# Altium PCB 智能车主板.PcbDoc
Units mil, origin at the board's own origin, x right, y up, seen from the top; angles counter-clockwise.
Board outline 3937.01 x 2560 mil, 4 copper layers (Top, GND02, PWR03, BOTTON), stack 23.756 mil thick; 92 components, 74 nets, 361 pads, 142 vias.
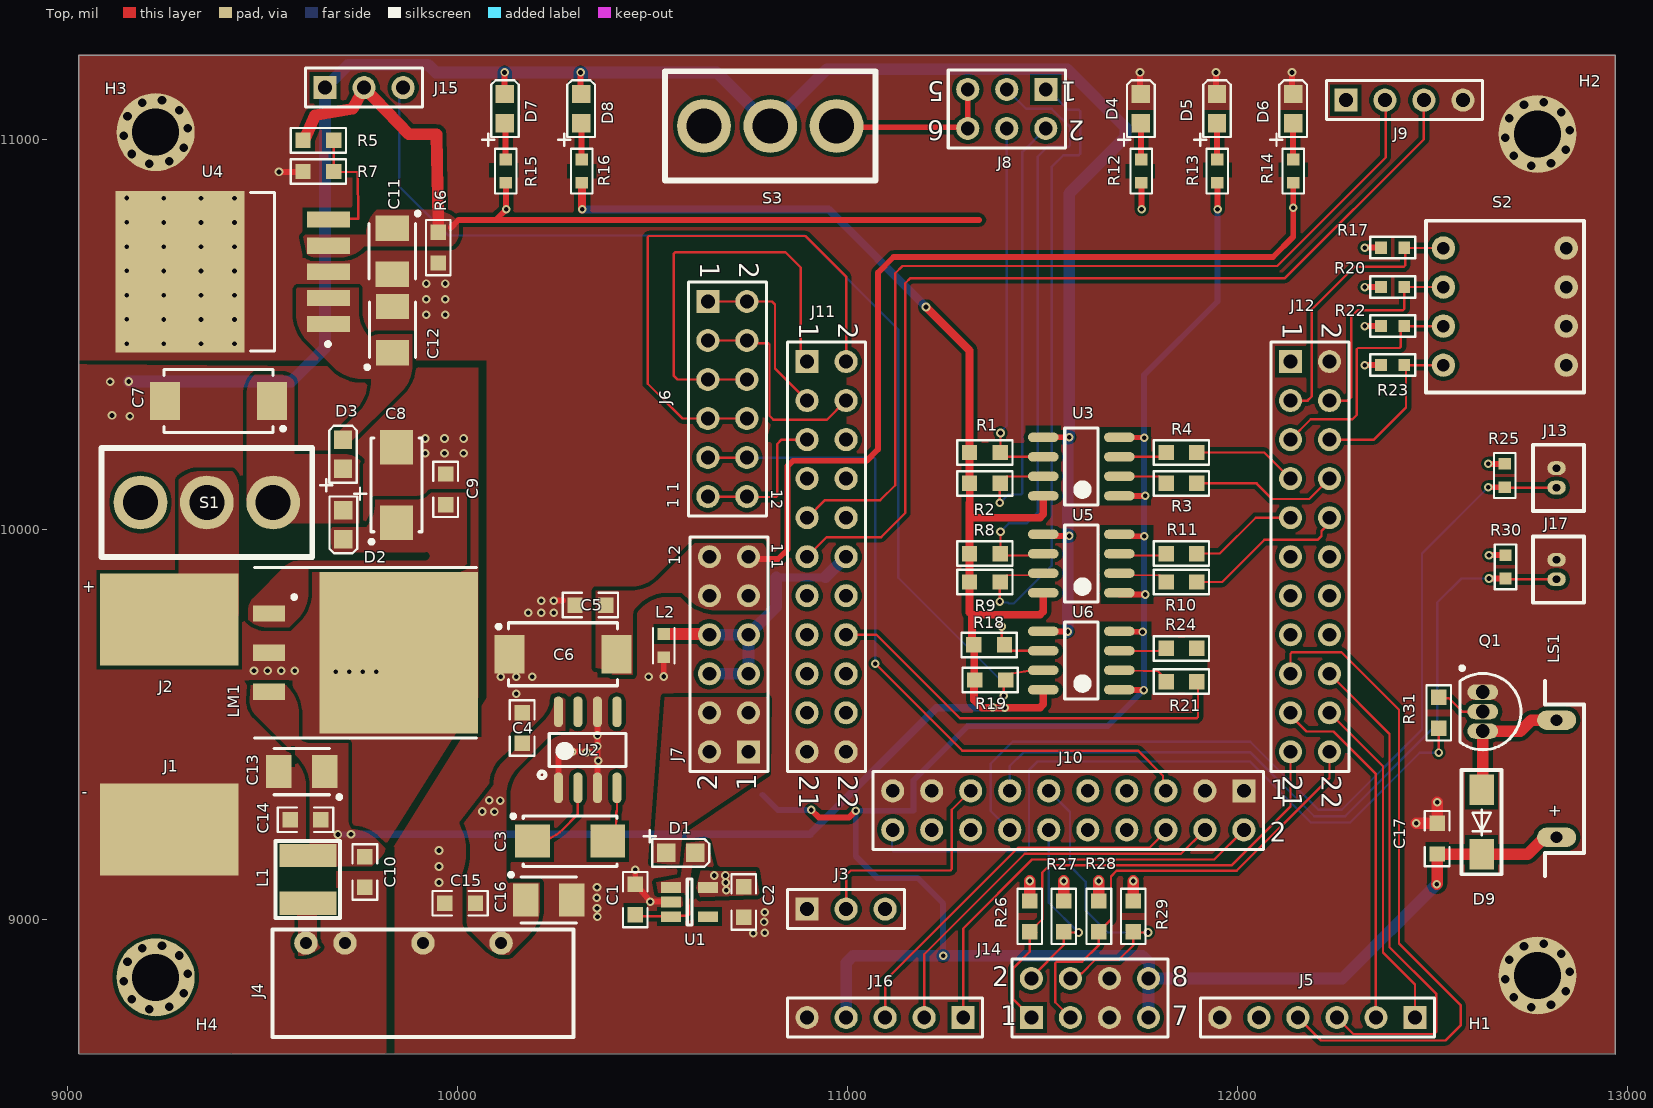
[diagram p0: Top view]
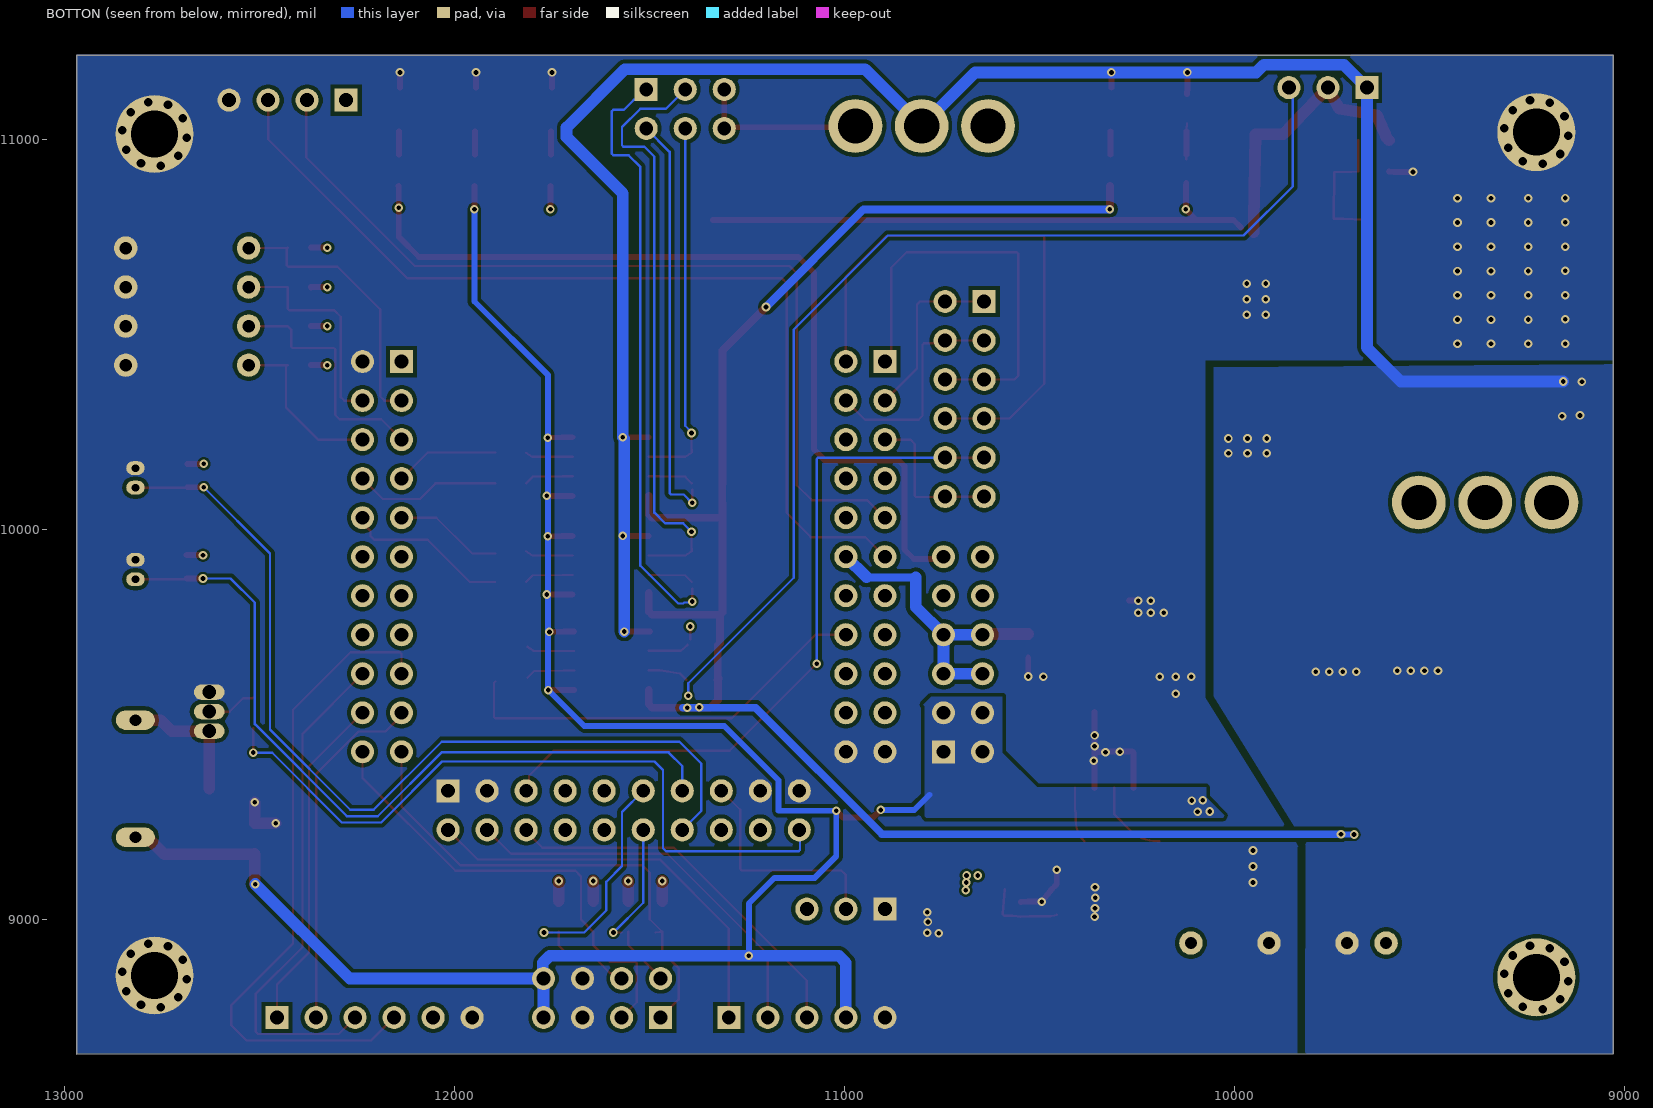
[diagram p1: BOTTON view, seen from below]
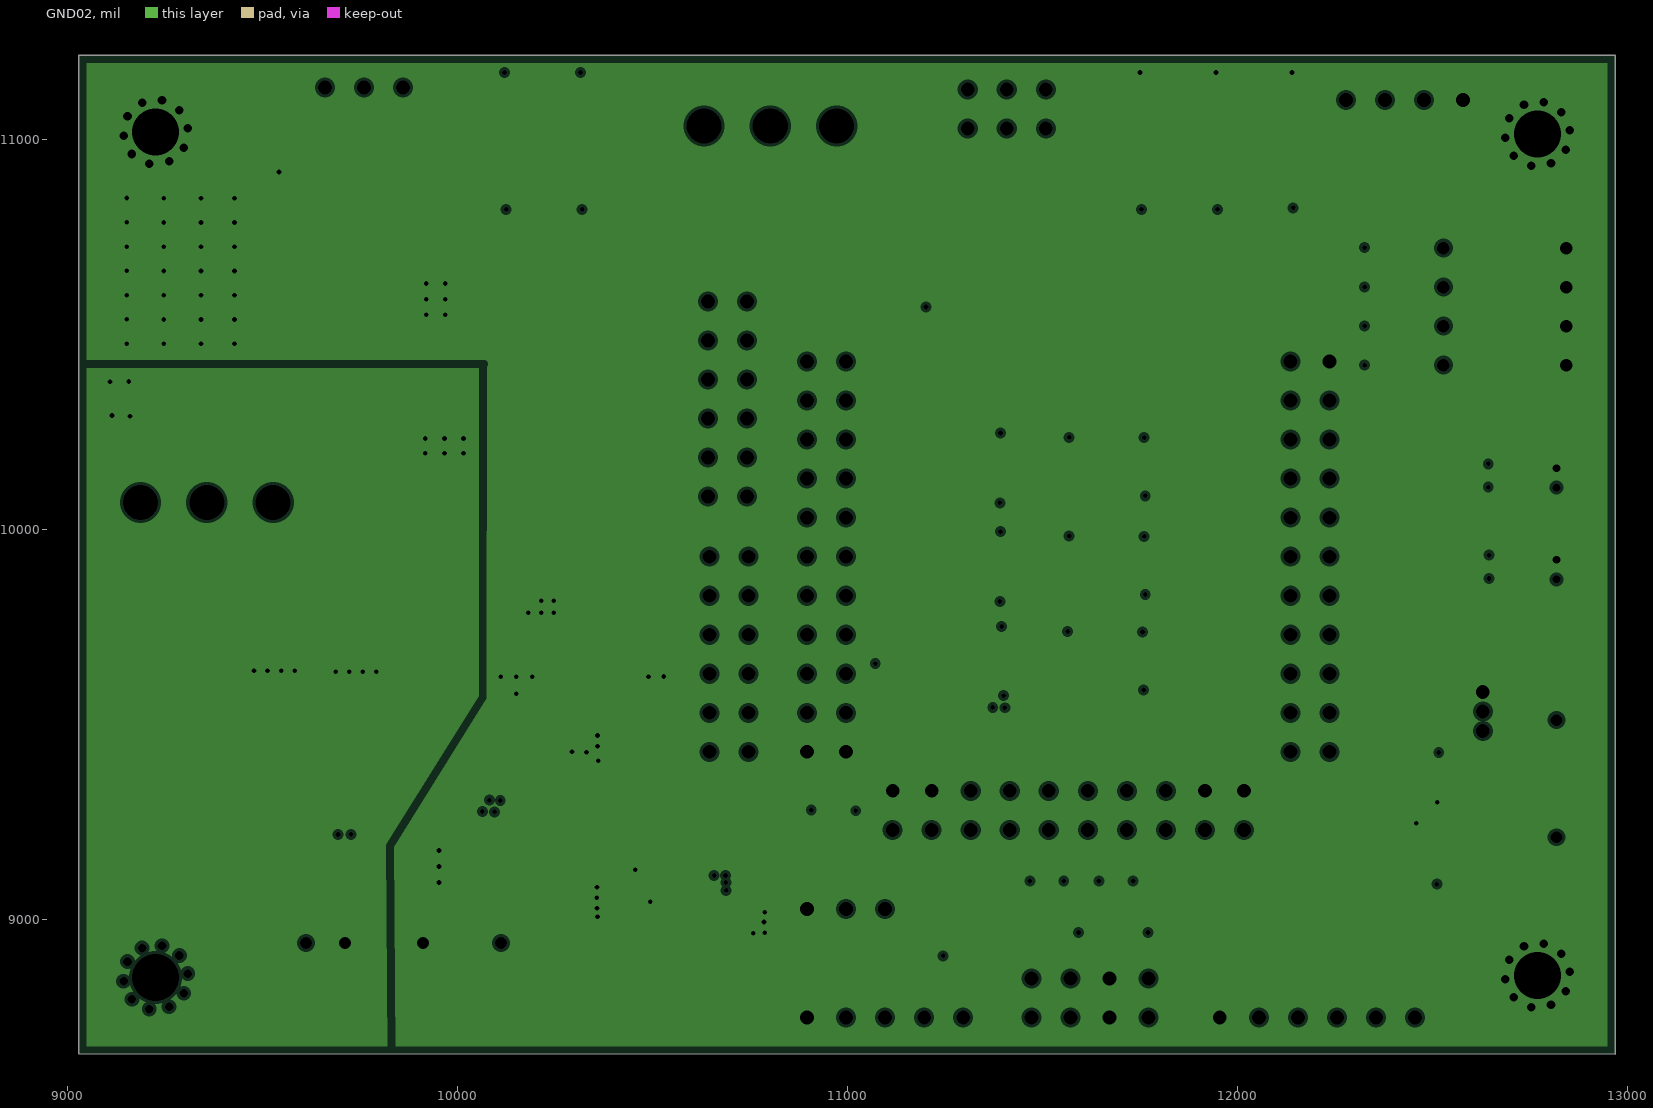
[diagram p2: GND02, clearances drawn from the general rule]
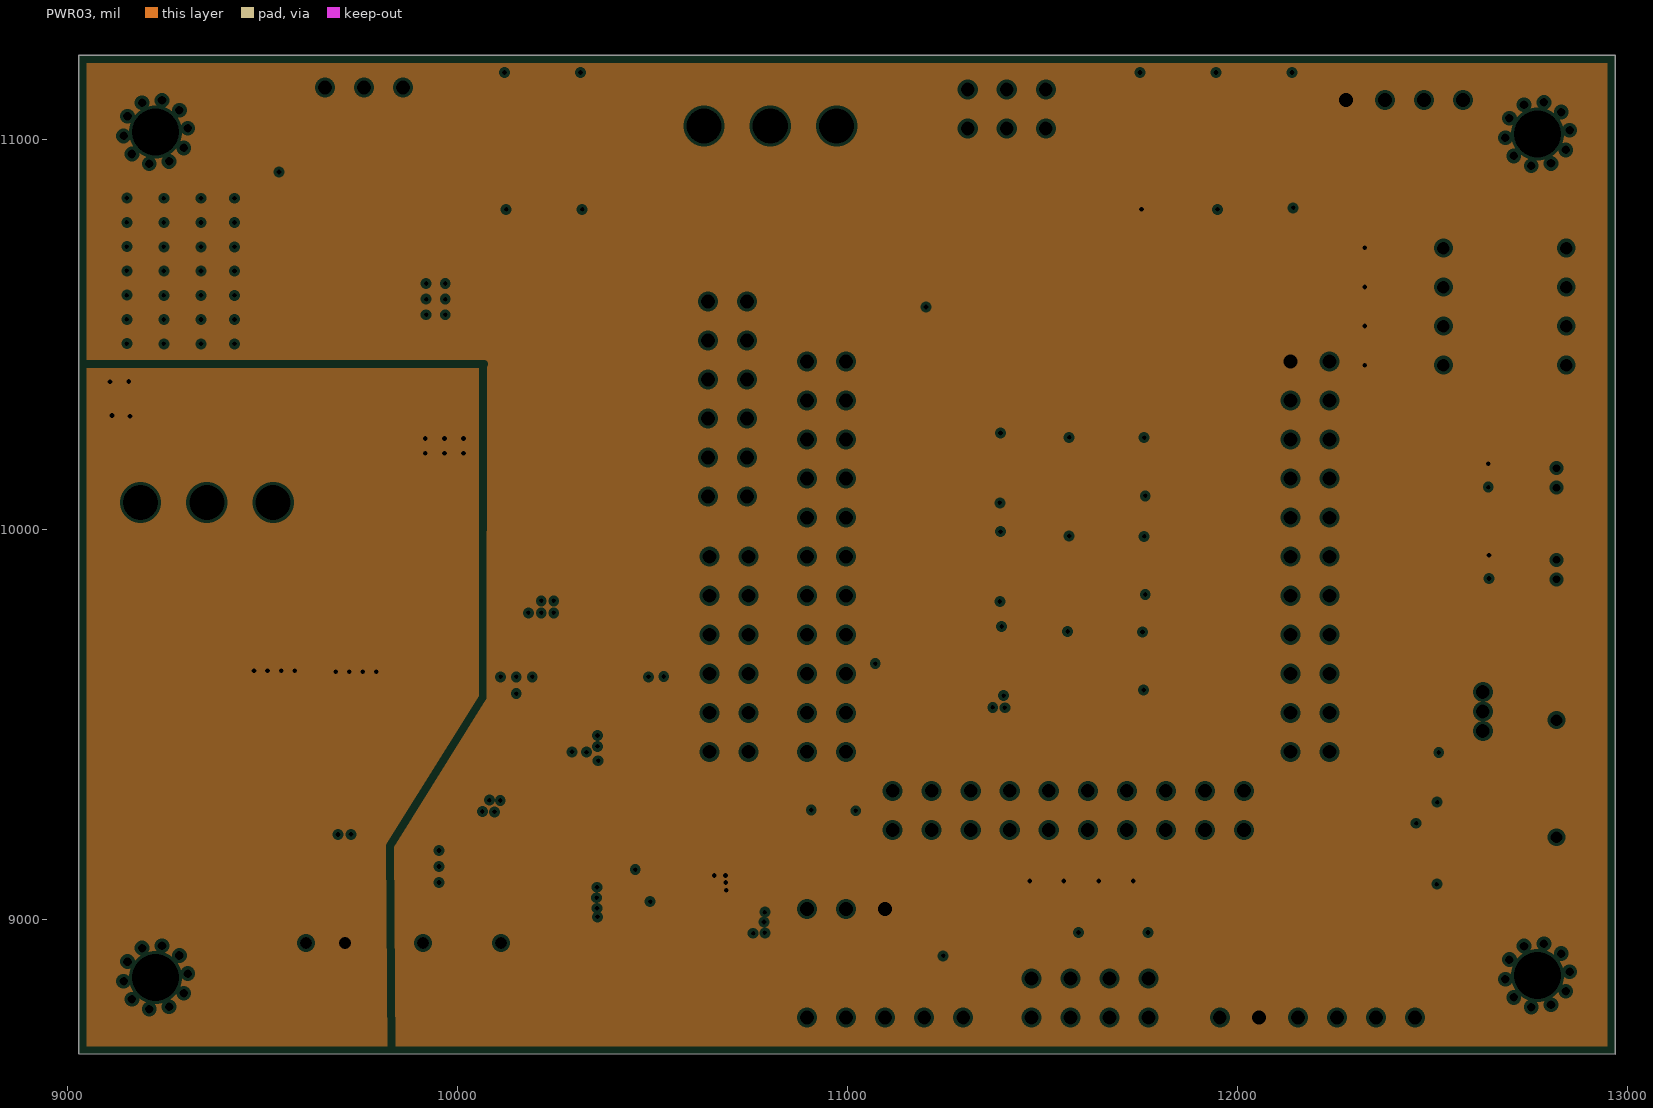
[diagram p3: PWR03, clearances drawn from the general rule]

## Layer stack, top to bottom
Top Solder: solder mask 0.4, Solder Resist, Dk 3.5
Top: signal copper 1.4
Dielectric 2: prepreg 2.8, PP-006, Dk 4.1
GND02: plane copper 1.378, net GND
Dielectric 1: dielectric 12.6, FR-4, Dk 4.8
PWR03: plane copper 1.378, net VCC3.3
Dielectric 3: prepreg 2.8, PP-006, Dk 4.1
BOTTON: signal copper 1.4
Bottom Solder: solder mask 0.4, Solder Resist, Dk 3.5

## Board outline
9030,8655.94 9030,11215 12967.01,11215 12967.01,8655

## Design rules (kind name [scope] priority, off if disabled: settings)
Clearance [All] p1: gap=6 ignorepadtopadclearanceinfootprint=FALSE except(8: Arc-Arc Arc-Track Track-Track; 10: Arc-Fill Arc-Poly Arc-Region Track-Fill Track-Poly Track-Region SMDPad-Fill SMDPad-Poly SMDPad-Region THPad-Fill THPad-Poly THPad-Region Fill-Fill Fill-Poly Fill-Region Poly-Poly Poly-Region Region-Region)
PlaneClearance [All] p1: clearance=8
PlaneConnect [All] p1: planeconnectstyle=Direct reliefexpansion=20 reliefentries=4 reliefconductorwidth=10 reliefairgap=10
PolygonConnect [All] p1: connectstyle=Direct reliefconductorwidth=10 reliefentries=4 polygonreliefangle="90 Angle" airgapwidth=10
RoutingVias [All] p1: holewidth=12 width=22 viastyle="Through Hole" minholewidth=12 minwidth=22 maxholewidth=12 maxwidth=22
SilkToSilkClearance [All] p1: silktosilkclearance=2
SilkToSolderMaskClearance [IsPad] p1: minsilkscreentomaskgap=2 clearancetoexposedcopper=TRUE
SolderMaskExpansion [All] p1: expansion=4 istentingtop=FALSE
SupplyNets "Schematic Supply Nets_10" [InNet('VBAT+')] p1: voltage=0.000
SupplyNets "Schematic Supply Nets_9" [InNet('GND')] p2: voltage=0.000
SupplyNets "Schematic Supply Nets_8" [InNet('AGND')] p3: voltage=0.000
SupplyNets "Schematic Supply Nets_7" [InNet('GGND')] p4: voltage=0.000
SupplyNets "Schematic Supply Nets_6" [InNet('VCC-5')] p5: voltage=0.000
SupplyNets "Schematic Supply Nets_5" [InNet('V5')] p6: voltage=0.000
SupplyNets "Schematic Supply Nets_4" [InNet('VCC5')] p7: voltage=0.000
SupplyNets "Schematic Supply Nets_3" [InNet('V6')] p8: voltage=0.000
SupplyNets "Schematic Supply Nets_2" [InNet('VCC3.3')] p9: voltage=0.000
SupplyNets "Schematic Supply Nets_1" [InNet('VCC')] p10: voltage=0.000
SupplyNets "Schematic Supply Nets" [InNet('VBAT')] p11: voltage=0.000
Width PWR [InNetClass('PWR')] p1: maxlimit=60 minlimit=15 preferedwidth=15
Width Width_1 [All] p2: maxlimit=6 minlimit=6 preferedwidth=6
26 further rules are at their usual default settings.

## Classes and differential pairs
net class PWR: AGND GGND GND NetD9_1 V5 V6 VBAT VBAT+ VCC VCC3.3 VCC5 VCC-5

## Components (designator, comment, footprint, x,y, rotation, side; value= is the part's Value field where it differs from the comment)
C1 "4.7uF" 0805C 10456,9051.37 r270 top locked
C2 "4.7uF" 0805C 10734,9045 r90 top locked
C3 "47uF" C型钽电容_6032_28 10289,9201 r0 top locked
C4 "10uF" 0805C 10166,9491 r90 top locked
C5 "0.1uF" 0805C 10341,9806 r0 top locked
C6 "100uF" D型钽电容_7343_31 10271,9680 r0 top locked
C7 "47uF" D型钽电容_7343_31 9388,10329 r180 top locked
C8 "22uF" C型钽电容_6032_28 9844,10114 r90 top locked
C9 "0.1uF" 0805C 9970,10102.63 r90 top locked
C10 "4.7uF" 0805C 9763,9122 r90 top locked
C11 "22uF" B型钽电容_3528_21 9833.17,10713 r270 top locked
C12 "22uF" B型钽电容_3528_21 9834,10512 r90 top locked
C13 "22uF" B型钽电容_3528_21 9601,9379 r180 top locked
C14 "0.1uF" 0805C 9611,9256 r180 top locked
C15 "0.1uF" 0805C 10007,9042 r0 top locked
C16 "22uF" B型钽电容_3528_21 10234,9050 r0 top locked
C17 "104" 0805C 12511,9207.63 r270 top locked
D1 "1N5819" 0805D 10572.6,9171 r0 top locked
D2 "SS34" 0805D 9707.77,10011.6 r270 top locked
D3 "1N5819" 0805D 9707,10192.6 r90 top locked
D4 "LED_2" 0805D 11751.5,11078.4 r90 top locked
D5 "LED_2" 0805D 11946.75,11078.4 r90 top locked
D6 "LED_2" 0805D 12142,11078.4 r90 top locked (schematic designator D5)
D7 "LED_2" 0805D 10122,11078.4 r90 top locked
D8 "LED_2" 0805D 10317.25,11078.4 r90 top locked
D9 "SS34" SS34_3D 12625,9250 r270 top locked
H1 "固定孔" 铜柱孔3 12768.15,8856.85 r0 top locked
H2 "固定孔" 铜柱孔3 12768.15,11013.15 r0 top locked
H3 "固定孔" 铜柱孔3 9226.85,11018.15 r0 top locked
H4 "固定孔" 铜柱孔3 9226.85,8851.85 r0 top locked
J1 "-" 单面焊盘2*3MM_1PIN 9261.67,9231.11 r90 top locked
J2 "-" 单面焊盘2*3MM_1PIN 9261.67,9769 r90 top locked
J3 "AD-KEY" HDR1X3 10896.32,9026.88 r0 top locked
J4 "bluetooth" B0505S-2W 9862,8940 r0 top locked
J5 "OLED" HDR1X6 12454,8749 r180 top locked
J6 "CON12" HDR2X6 10642,10584 r270 top locked
J7 "CON12" HDR2X6 10746,9430 r90 top locked
J8 "motor drive" HDR2X3 11508,11127.44 r180 top locked
J9 "bluetooth" HDR1X4 12277,11100 r0 top locked
J10 "HEADER 10X2" HDR2X10 12015.63,9330 r180 top
J11 "HEADER 11X2" HDR2X11 10896.32,10430 r270 top
J12 "HEADER 11X2" HDR2X11 12135,10430 r270 top
J13 "CON2" 2PIN杜邦插座_1.27mm 12816.96,10107 r90 top locked
J14 "BM" HDR2X4 11471,8749 r0 top locked
J15 "servo drive" HDR1X3 9661,11132 r0 top locked
J16 "CCD" HDR1X5 11296.32,8749 r180 top locked
J17 "CON2" 2PIN杜邦插座_1.27mm 12816.96,9872 r90 top locked
L1 "6.8uH" CDRH3D16_4.2*1.8 9617,9102.98 r180 top locked
L2 "100M" 0603L 10529,9702 r270 top locked
LM1 "lm2940" LM2940 9833.66,9679 r0 top locked
LS1 "Bell" 蜂鸣器侧装 12816.96,9411 r90 top locked
Q1 "2N3904" TO-92A 12628,9533 r180 top locked
R1 "1k" 0805R 11351.82,10197.07 r0 top locked
R2 "1k" 0805R 11351.82,10117.82 r0 top locked
R3 "1k" 0805R 11855.63,10117.82 r180 top locked
R4 "1k" 0805R 11855.63,10197.07 r180 top locked
R5 "3.9k" 0805R 9644,10997 r180 top locked
R6 "1k" 0805R 9951,10722 r90 top locked
R7 "1k" 0805R 9644,10917 r0 top locked
R8 "1k" 0805R 11351.82,9938 r0 top locked
R9 "1k" 0805R 11351.82,9865 r0 top locked
R10 "1k" 0805R 11855.63,9865 r180 top locked
R11 "1k" 0805R 11855.63,9938 r180 top locked
R12 "1k" 0603R 11752.5,10918 r270 top locked
R13 "2.2k" 0603R 11947.25,10918 r270 top locked
R14 "3.3k" 0603R 12142,10918 r270 top locked
R15 "3.3k" 0603R 10124,10918 r270 top locked
R16 "3.3k" 0603R 10318.75,10918 r270 top locked
R17 "1k" 0603R 12397.08,10722 r0 top locked
R18 "1k" 0805R 11362.82,9704 r0 top locked
R19 "1k" 0805R 11365.56,9613.98 r0 top locked
R20 "1k" 0603R 12397.08,10621 r0 top locked
R21 "1k" 0805R 11855.63,9610 r180 top locked
R22 "1k" 0603R 12397.08,10521 r0 top locked
R23 "1k" 0603R 12397.08,10421 r0 top locked
R24 "1k" 0805R 11855.63,9695 r180 top locked
R25 "1k" 0603R 12684,10138.08 r270 top locked
R26 "1k" 0805R 11467,9008.37 r270 top locked
R27 "1k" 0805R 11554,9008.37 r270 top locked
R28 "1k" 0805R 11644,9008.37 r270 top locked
R29 "1k" 0805R 11732,9008.37 r270 top locked
R30 "1k" 0603R 12686,9904 r270 top locked
R31 "1k" 0805R 12515,9530 r90 top locked
S1 "SW-SPST" 开关 9513,9814 r270 top locked
S2 "SW DIP-4" 4路拨码开关 12542,10666 r0 top locked
S3 "SW-SPST" 开关 10957,10778.87 r270 top locked
U1 "TPS73633" SOT23_5-LEADS 10595,9045 r0 top locked
U2 "LM2663" SOP_8(OPA) 10334,9435 r90 top locked
U3 "HCPL0631" SOP_8(OPA) 11599,10161 r180 top locked
U4 "MIC29302" TO_263_5(10.5*8.4mm) 9447,10664 r0 top locked
U5 "HCPL0631" SOP_8(OPA) 11599,9912.5 r180 top locked
U6 "HCPL0631" SOP_8(OPA) 11599,9664 r180 top locked

## Footprints (in the part's own frame and the unit in brackets; to place one, negate y for a bottom-side part, rotate by r counter-clockwise, add the part's x,y. Pads: shape width x height; smd on the part's side, far side on the other; paste and mask are expansions set on the pad)
2PIN杜邦插座_1.27mm [mm]
  oval 0.9x1.2 hole 0.5: 1(0,0) 2(1.27,0)
  silkscreen extent -1.52,-1.78 2.79,1.52
4路拨码开关 [mil]
  round 60 hole 32.01: 1(-15,55) 2(-15,-45) 3(-15,-145) 4(-15,-245) 5(299.96,-245) 6(299.96,-145) 7(299.96,-45) 8(299.96,55)
  silkscreen extent -60,-315 345,125
0603L [mm]
  rect 0.76x0.8 smd: 1(-0.76,0) 2(0.76,0)
  silkscreen extent -1.15,-0.7 1.15,0.7
0603R [mm]
  rect 0.76x0.8 smd: 1(-0.76,0) 2(0.76,0)
  silkscreen extent -1.46,-0.7 1.46,0.7
0805C [mm]
  rect 1x1 smd: 1(-1,0) 2(1,0)
  silkscreen extent -1.8,-0.8 1.8,0.8
0805D [mm]
  rect 1.2x1.2 smd: 1(-0.95,0) 2(0.95,0)
  silkscreen extent -2.42,-0.9 1.85,1.49
0805R [mm]
  rect 1x1 smd: 1(-1,0) 2(1,0)
  silkscreen extent -1.8,-0.8 1.8,0.8
B0505S-2W [mil]
  round 60 hole 30: 1(-250,0) 2(-150,0) 3(50,0) 4(250,0)
  silkscreen extent -336,-241 436,35
B型钽电容_3528_21 [mm] "Molded Capacitor, 2-Leads, Body 3.5x2.8mm, IPC Medium Density"
  rect 1.65x2.15 smd: 1(-1.5,0) 2(1.5,0)
  silkscreen extent -2.57,-1.5 1.8,1.78, body extent -1.8,-1.45 1.8,1.45, height 1.9
CDRH3D16_4.2*1.8 [mm]
  rect 3.7x1.5 smd: 1(0,-1.55) 2(0,1.55)
  silkscreen extent -2.1,-2.5 2.1,2.5
C型钽电容_6032_28 [mm] "Molded Capacitor, 2-Leads, Body 6.0x3.2mm, IPC Medium Density"
  rect 2.25x2.15 smd: 1(-2.45,0) 2(2.45,0)
  silkscreen extent -3.82,-1.65 3.05,1.75, body extent -3,-1.6 3,1.6, height 2.5
D型钽电容_7343_31 [mm] "Molded Capacitor, 2-Leads, Body 7.3x4.3mm, IPC Medium Density"
  rect 1.95x2.5 smd: 1(-3.475,0) 2(3.475,0)
  silkscreen extent -4.32,-2.05 3.55,2.05, body extent -3.65,-2.15 3.65,2.15, height 2.8
HDR1X3 [mm] "Connector; Header; 3 Position"
  rect 1.5x1.5 hole 0.9: 1(0,0)
  round 1.5 hole 0.9: 2(2.54,0) 3(5.08,0)
  silkscreen extent -1.27,-1.27 6.35,1.27
HDR1X4 [mm] "Connector; Header; 4 Position"
  rect 1.5x1.5 hole 0.9: 1(0,0)
  round 1.5 hole 0.9: 2(2.54,0) 3(5.08,0) 4(7.62,0)
  silkscreen extent -1.27,-1.27 8.89,1.27
HDR1X5 [mm] "Connector; Header; 5 Position"
  rect 1.5x1.5 hole 0.9: 1(0,0)
  round 1.5 hole 0.9: 2(2.54,0) 3(5.08,0) 4(7.62,0) 5(10.16,0)
  silkscreen extent -1.27,-1.27 11.43,1.27
HDR1X6 [mm] "Connector; Header; 6 Position"
  rect 1.5x1.5 hole 0.9: 1(0,0)
  round 1.5 hole 0.9: 2(2.54,0) 3(5.08,0) 4(7.62,0) 5(10.16,0) 6(12.7,0)
  silkscreen extent -1.27,-1.27 13.97,1.27
HDR2X3 [mm] "Connector; Header; 3x2 Position"
  rect 1.5x1.5 hole 0.9: 1(0,0)
  round 1.5 hole 0.9: 2(0,2.54) 3(2.54,0) 4(2.54,2.54) 5(5.08,0) 6(5.08,2.54)
  silkscreen extent -1.27,-1.27 6.35,3.81
HDR2X4 [mm] "Connector; Header; 4x2 Position"
  rect 1.5x1.5 hole 0.9: 1(0,0)
  round 1.5 hole 0.9: 2(0,2.54) 3(2.54,0) 4(2.54,2.54) 5(5.08,0) 6(5.08,2.54) 7(7.62,0) 8(7.62,2.54)
  silkscreen extent -1.27,-1.27 8.89,3.81
HDR2X6 [mm] "Connector; Header; 6x2 Position"
  rect 1.5x1.5 hole 0.9: 1(0,0)
  round 1.5 hole 0.9: 2(0,2.54) 3(2.54,0) 4(2.54,2.54) 5(5.08,0) 6(5.08,2.54) 7(7.62,0) 8(7.62,2.54) 9(10.16,0) 10(10.16,2.54) 11(12.7,0) 12(12.7,2.54)
  silkscreen extent -1.27,-1.27 13.97,3.81
HDR2X10 [mm] "Connector; Header; 10x2 Position"
  rect 1.5x1.5 hole 0.9: 1(0,0)
  round 1.5 hole 0.9: 2(0,2.54) 3(2.54,0) 4(2.54,2.54) 5(5.08,0) 6(5.08,2.54) 7(7.62,0) 8(7.62,2.54) 9(10.16,0) 10(10.16,2.54) 11(12.7,0) 12(12.7,2.54) 13(15.24,0) 14(15.24,2.54) 15(17.78,0) 16(17.78,2.54) 17(20.32,0) 18(20.32,2.54) 19(22.86,0) 20(22.86,2.54)
  silkscreen extent -1.27,-1.27 24.13,3.81
HDR2X11 [mm] "Connector; Header; 11x2 Position"
  rect 1.5x1.5 hole 0.9: 1(0,0)
  round 1.5 hole 0.9: 2(0,2.54) 3(2.54,0) 4(2.54,2.54) 5(5.08,0) 6(5.08,2.54) 7(7.62,0) 8(7.62,2.54) 9(10.16,0) 10(10.16,2.54) 11(12.7,0) 12(12.7,2.54) 13(15.24,0) 14(15.24,2.54) 15(17.78,0) 16(17.78,2.54) 17(20.32,0) 18(20.32,2.54) 19(22.86,0) 20(22.86,2.54) 21(25.4,0) 22(25.4,2.54)
  silkscreen extent -1.27,-1.27 26.67,3.81
LM2940 [mm]
  rect 2.1x1.05 smd: 1(-8.035,2.667) 2(-8.035,0.127) 3(-8.035,-2.413)
  rect 10.3x10.5 smd: 4(0.415,0.127)
  silkscreen extent -8.98,-5.42 5.47,5.68
SOP_8(OPA) [mm] "SOIC, 8-Leads, Body 5.0x4.0mm (max), Pitch 1.27mm, IPC Medium Density"
  oval 2x0.6 smd: 1(-2.475,1.905) 2(-2.475,0.635) 3(-2.475,-0.635) 4(-2.475,-1.905) 5(2.475,-1.905) 6(2.475,-0.635) 7(2.475,0.635) 8(2.475,1.905)
  silkscreen extent -1.07,-2.5 1.08,2.5, body extent -2,-2.5 2,2.5, height 1.75
SOT23_5-LEADS [mm] "SOT23, 5-Leads, Body 3.0x3.0mm (max), Pitch 0.95mm, IPC Low Density"
  rect 1.3x0.7 smd: 1(-1.2,0.95) 2(-1.2,0) 3(-1.2,-0.95) 4(1.2,-0.95) 5(1.2,0.95)
  silkscreen extent -0.15,-1.5 0.15,1.5, body extent -0.85,-1.52 0.85,1.53, height 1.45
SS34_3D [mm]
  rect 2x1.6 smd: 1(-2.1,0) 2(2.1,0)
  silkscreen extent -3.4,-1.3 3.4,1.3, body extent -2.46,-1.36 2.54,1.34, height 2.15
TO-92A [mm] "TO, Flat Index; 3 In-Line, Axial Leads; Body Dia. 4.5mm; Leads 0.51 x 0.48 mm (max)"
  oval 2x1 hole 0.9: 1(0,-1.27) 2(0,0) 3(0,1.27)
  silkscreen extent -2.48,-2.95 1.5,2.48, body extent -2.48,-2.5 1.5,2.5, height 6.86
TO_263_5(10.5*8.4mm) [mm] "D2-PAK, 6-Pads, Body 8.8x10.3mm (max), IPC Medium Density"
  rect 2.8x1.05 smd: 1(5.65,-3.5) 2(5.65,-1.8) 3(5.65,-0.1) 4(5.65,1.6) 5(5.65,3.3)
  rect 8.4x10.5 smd: 3(-4,-0.1)
  silkscreen extent 0.6,-5.25 5.75,5.05, body extent -8.63,-5.1 7.03,4.9
单面焊盘2*3MM_1PIN [mm]
  rect 6x9 smd: 1(0,0)
开关 [mil]
  round 137.8 hole 90: 1(-255,15) 2(-255,-155) 3(-255,-325)
  silkscreen extent -395,-425 -115,115
蜂鸣器侧装 [mil]
  oval 50x100 hole 30: 1(-200,0) 2(100,0)
  silkscreen extent -300,-70 200,30
铜柱孔3 [mil]
  round 23 hole 22: 11(-82.21,-9.67) 11(-72.19,40.5) 11(-60.83,-56.14) 11(-34.6,75.2) 11(-16.21,-81.17) 11(16.21,81.17) 11(34.6,-75.2) 11(60.83,56.14) 11(72.19,-40.5) 11(82.21,9.67)
  round 200 hole 120: 11(0,0)

## Part data
C1 C2 C10: library part CAP_2, "电容"
C3 C7: library part 极性电容, "极性电容"
C4: library part CAP, "电容"
C5 C9 C14 C15: library part CAP_1, "电容"
C6: library part 极性电容_1, "极性电容"
C8 C11 C12 C13 C16: library part 极性电容_2, "极性电容"
C17: library part CAP_3, "电容"
D1 D3: library part SS34, "二极管"
D2 D9: library part SS34_1, "二极管"
D4 D5 D6 D7 D8: library part LED
J1 J2: library part CON1, "Connector"
J3: library part CON3, "SOCKET"
J4 J9: library part CON4, "Connector"
J5: library part CON6, "Connector"
J6 J7 J13 J17: "Connector"
J8: library part CON6_1, "Connector"
J10 J11 J12: "排针"
J14: library part CON8, "Connector"
J15: library part CON3_1, "SOCKET"
J16: library part CON5, "Connector"
L1: library part INDUCTOR, "电感"
L2: library part INDUCTOR_2
LM1 U1 U2 U4: "IC"
LS1: "Electrical Bell", LatestRevisionDate=17-Jul-2002, LatestRevisionNote="Re-released for DXP Platform.", PackageReference=PIN2, Published=24-Mar-1999, Publisher="Altium Limited"
Q1: "NPN General Purpose Amplifier", PackageDocument=Sep-1998, Code_JEDEC=TO-92A, ComponentLink1Description="Manufacturer Link", ComponentLink1URL=http://www.fairchildsemi.com/, ComponentLink2Description=Datasheet, ComponentLink2URL=http://www.fairchildsemi.com/ds/2N%2F2N3904.pdf, DatasheetDocument=1997, LatestRevisionDate=15-Jan-2003, LatestRevisionNote="PCB Footprint 'BCY-W3/D4.7' replaced", PackageReference=TO-92A, Published=8-Jun-2000, Publisher="Altium Limited"
R1 R2 R3 R4 R6 R7 R8 R9 R10 R11 R12 R17 R18 R19 R20 R21 R22 R23 R24 R25 R26 R27 R28 R29 R30 R31: library part RES_1, "电阻"
R5: library part RES, "电阻"
R13: library part RES_2, "电阻"
R14 R15 R16: library part RES_3, "电阻"
S1 S3: "Single-Pole, Single-Throw Switch", LatestRevisionDate=17-Jul-2002, LatestRevisionNote="Re-released for DXP Platform.", PackageDescription="Switch; 2 Leads", PackageReference=SPST-2, Published=24-Mar-1999, Publisher="Altium Limited"
S2: "DIP Switch"
U3 U5 U6: "光耦"

## Via types
v1: diameter 22, hole 12, Top to BOTTON, tented both sides, 142 vias

## Nets (pads, with @x,y where several pads share a name; then routed paths per layer and width w, separated by ;. In a path a pad name is that pad's centre, name@x,y a point inside that pad or via, vN(x,y) a via of type N, cw(c..) or ccw(c..) an arc to the next point about the centre after c; other vN are vias at no path point)
A1: J11.7
ADB2: J6.9 J6.10 J10.5 | length 1853
  Top w6: J6.9 J6.10 ; v1(11071,9656) 11294,9433 11744,9433 11808.47,9368.53 11808.47,9337.16 J10.5
  BOTTON w6: J6.10 11067.49,10184 11071,10180.49 v1(11071,9656)
ADE20: J6.1 J6.2 J11.3 | length 455.4
  Top w6: J6.1 J6.2 10806,10584 10814,10576 10814,10412.32 J11.3
ADE21: J6.3 J6.4 J11.4 | length 565.6
  Top w6: J6.3 J6.4 10749,10477 10796.49,10477 10800,10473.49 10800,10291 10810,10281 10947.32,10281 J11.4
ADE22: J6.5 J6.6 J11.1 | length 1095.3
  Top w6: J6.6 J6.5 10564,10384 10555,10393 10555,10707 10558.51,10710.51 10840.49,10710.51 10880,10671 10880,10446.32 J11.1
ADE23: J6.7 J6.8 J11.2 | length 1437
  Top w6: J6.8 J6.7 10577,10284 10488,10373 10488,10748.49 10491.51,10752 10892,10752 10996.32,10647.68 J11.2
ADE29: J11.6
ADE30: J6.11 J6.12 J11.5 | length 393.2
  Top w6: J6.11 J6.12 10743,10083 10816.49,10083 10820,10086.51 10820,10219 10831,10230 J11.5
AGND: J7.5 J7.6 J7.7 J7.8 J11.12 L2.1 | length 795.5
  Top w30: L2.1 L2.1 10644.12,9731.88 J7.8
  BOTTON w20: 10817,9877 10943.32,9877
  BOTTON w30: J7.6 J7.5 J7.7 ; J7.8 J7.7 ; 10817,9877 10817,9801 J7.7 ; 10943.32,9877 J11.12
B16: J10.11 J14.4 R29.2 | length 781.2
  Top w6: J14.4 11585.36,8849 11598.6,8862.24 11600.24,8862.24 11635,8897 11695,8897 11732,8934 R29.2 ; R29.2@11748.69,8967 v1(11770,8967)
  BOTTON w6: J10.11 11570,9275.63 11570,9137 11610,9097 11610,9024 11667,8967 v1(11770,8967)
B17: J10.12 J14.2 R27.2 | length 470.3
  Top w6: J14.2 11471,8852 11554,8935 R27.2 ; R27.2@11570.69,8967 v1(11592,8967)
  BOTTON w6: J10.12 11515.63,9043.37 v1(11592,8967)
C0: J3.2 J10.15 | length 585
  Top w6: J3.2 10996.32,9114.32 11008,9126 11263.49,9126 11267,9129.51 11267,9281.37 J10.15
C1: J10.16
C2: J10.18
C3: J10.20 R31.1 | length 1868.4
  Top w6: v1(12515,9428) R31.1
  BOTTON w6: J10.20 11114,9228.37 11114,9178.51 11117.51,9175 11457,9175 11465,9183 11465,9383 11487,9405 12031,9405 12187,9249 12288,9249 12466.36,9427.36 12514.36,9427.36 v1(12515,9428)
C4: J12.22 J14.3 R28.2 | length 1206.8
  Top w6: J14.3 11532,8788 11532,8888.49 11535.51,8892 11601,8892 11644,8935 R28.2 11675.1,9000.1 11675.1,9110.59 11689.51,9125 11997,9125 12235,9363 J12.22
C5: J12.21 J14.1 R26.2 | length 1284.2
  Top w6: J14.1 11425,8795 11425,8876 11467,8918 R26.2 ; R26.2@11483.69,8967 R26.2 ; J12.21 12135,9290 11984,9139 11517.51,9139 11499.1,9120.59 11499.1,9001.1 R26.2
C6: J5.1 J12.20 | length 871.7
  Top w6: J12.20 12372,9393 12372,8916 12454,8834 J5.1
C7: J5.2 J12.19 | length 912.1
  Top w6: J12.19 12135,9523 12176,9482 12245,9482 12354,9373 J5.2
C8: J5.3 J12.18 | length 1305.4
  Top w6: J12.18 12389,9476 12389,8929 12509,8809 12509,8713 12503,8707 12296,8707 J5.3
C9: J5.4 J12.17 | length 1723.9
  Top w6: J12.17 12135,9681.49 12138.51,9685 12266,9685 12413,9538 12413,8939 12571,8781 12571,8729 12532,8690 12213,8690 J5.4
CCDB0: J10.2 J16.1 | length 1052.3
  Top w6: J16.1 11296.32,8977.32 11473,9154 11939.63,9154 J10.2
CCDB1: J10.4 J16.2 | length 1013.6
  Top w6: J16.2 11196.32,8911.32 11454,9169 11854.63,9169 J10.4
CCDB3: J10.6 J16.3 | length 976.4
  Top w6: J16.3 11096.32,8843.32 11437,9184 11774,9184 11815.63,9225.63 J10.6
D4: J12.6 R23.2 S2.4 | length 440.6
  Top w6: J12.6 12349,10230 12431,10312 12431,10417 R23.2 S2.4
D5: J12.5 R22.2 S2.3 | length 636.7
  Top w6: J12.5 12187,10282 12294,10282 12305,10293 12305,10461.49 12308.51,10465 12414.49,10465 12418,10468.51 12418,10512 R22.2 S2.3
D6: J12.4 R20.2 S2.2 | length 565.7
  Top w6: J12.4 12282,10330 12291,10339 12291,10545 12308,10562 12423.49,10562 12427,10565.51 R20.2 S2.2
D7: J12.3 R17.2 S2.1 | length 714.7
  Top w6: J12.3 12179,10330 12190,10341 12190,10564 12299,10673 12425.49,10673 12429,10676.51 12429,10720 R17.2 ccw(c12429.41,10724.41) 12429.41,10721 S2.1
GGND: C7.2 C8.2 C9.2 C10.1 C13.2 C14.2 D7.2 D8.2 J1.1 J4.2 J15.1 LM1.2 LM1.4 S3.2 U3.5 U5.5 U6.5 | length 5114.2
  Top w15: v1(10121,11171) 10121,11131.93 D7.2 ; D8.2@10315.75,11131.93 v1(10315.75,11171) ; U6.5@11497.56,9738.18 v1(11564,9738.18) ; U5.5@11501.56,9983.18 v1(11568,9983.18) ; U3.5 v1(11568,10236)
  BOTTON w30: v1(9158,10379) 9574,10379 9661,10466 J15.1 9720,11191 9925,11191 9945,11171 v1(10121,11171) v1(10315.75,11171) 10664.87,11171 S3.2 10947.13,11179 11563,11179 11712.07,11029.93 11712.07,11005.07 11568,10861 v1(11568,10236) 11564,10232 v1(11564,9738.18)
  other v1: 9688,9635 9722.67,9635 9757.33,9635 9792,9635 9479,9638 9513.67,9638 9548.33,9638 9583,9638 9918,10195 9967,10195 10016,10195 9918,10233 9967,10233 10016,10233 9161,10290 9115,10292 9110,10378
GHGL: J10.13 J17.1 R30.2 | length 1976.3
  Top w6: R30.2 ccw(c12691.02,9879.1) 12691.02,9872 J17.1@12811,9872
  Top w15: v1(12643.84,9874.08) R30.2
  BOTTON w6: J10.13 11415.63,9393.63 11450.5,9428.5 12032.5,9428.5 12196,9265 12275,9265 12510.89,9500.89 12510.89,9812 12572.97,9874.08 v1(12643.84,9874.08)
GHGR: J10.14 J13.1 R25.2 | length 2334.7
  Top w6: R25.2 ccw(c12686.79,10110.95) 12686.79,10107 J13.1@12809,10107
  Top w15: v1(12641.84,10108.16) R25.2
  BOTTON w6: J10.14 11367,9278.63 11367,9400 11423,9456 12032,9456 12206.5,9281.5 12266.5,9281.5 12472,9487 12472,9938.31 v1(12641.84,10108.16)
GND: C1.1 C2.1 C4.2 C5.1 C6.1 C11.2 C12.2 C15.1 C16.2 C17.1 D4.2 D5.2 D6.2 H1.11 H2.11 H3.11 J3.1 J4.3 J5.6 J9.4 J10.1 J10.3 J10.17 J10.19 J11.21 J11.22 J12.2 J13.2 J14.5 J14.6 J16.5 J17.2 L2.2 Q1.1 R6.1 R7.1 S2.5 S2.6 S2.7 S2.8 U1.2 U2.1 U2.3 U2.6 U4.3 | length 899.7
  Top w15: v1(9543,10916) 9592.44,10916 R7.1 ; v1@10244,9818 10271,9818 ; U2.1 10259,9423.76 cw(c10269.24,9423.76) 10262,9431 10331,9431 10332.5,9429.5 10358.5,9429.5 10359,9430 ; U2.3 10359,9430 ; U2.6 10359,9430 ; v1(10456,9128) C1.1 10468.19,9078.56 v1(10494,9046) 10529.67,9046 U1.2 ; v1(10529,9623) L2.2 ; D4.2@11749.5,11131.93 v1(11749.5,11171) ; D5.2@11944.25,11131.93 v1(11944.25,11171) ; D6.2@12139,11131.93 v1(12139,11171)
  Top w30: v1(12457,9247) C17.1 v1(12511,9301)
  other v1: 10758,8965 10788,8966 10786,8994 10359,9007 10788,9019 10358,9029 10357,9056 10358,9083 9953,9095 9953,9136 9953,9177 10361,9407 10331,9429 10294,9430 10359,9444 10359,9472 10151,9579 10111,9622 10151,9622 10192,9622 10490,9622 10182,9786 10215,9786 10247,9786 10215,9817 10247,9817 9153,10476 9248,10475.5 9343,10475.5 9429,10475.5 9153,10538.17 9248,10537.67 9343,10537.67 9429,10537.67 9920,10550 9969,10550 9920,10590 9969,10590 9153,10600.33 9248,10599.83 9343,10599.83 9429,10599.83 9920,10630 9969,10630 9153,10662.5 9248,10662 9343,10662 9429,10662 9248,10724.17 9343,10724.17 9429,10724.17 9153,10724.67 9248,10786.33 9343,10786.33 9429,10786.33 9153,10786.83 9248,10848.5 9343,10848.5 9429,10848.5 9153,10849
LPWM1: J8.1 R9.2 U5.7 | length 1654.4
  Top w6: v1(11390.38,9815.07) R9.2@11390.38,9848.31 ; R9.2 11407.87,9881.69 11474,9883.18 U5.7@11501.56,9883.18
  BOTTON w6: v1(11390.38,9815.07) 11392.94,9812.51 11410.38,9812.51 11412.89,9810 11426,9810 11523,9907 11523,10928.87 11553.13,10959 11592.49,10959 11596,10962.51 11596,11071.49 11592.49,11075 11565.44,11075 11539.53,11100.91 11534.53,11100.91 J8.1
LPWM2: J8.3 R8.2 U5.6 | length 1534.5
  Top w6: v1(11392,9994.18) 11392,9960.94 11391.19,9944.26 11394.07,9942.34 11407.87,9933.18 U5.6@11501.56,9933.18
  BOTTON w6: v1(11392,9994.18) 11413.2,10015.38 11459.38,10015.38 11487,10043 11487,10955 11513,10981 11566.49,10981 11570,10984.51 11570,11031 11523,11078 11457.44,11078 J8.3
"motor L+": J12.10 R10.1 | length 423.6
  Top w6: R10.1 11960,9865 12068,9973 12204,9973 12214.42,9983.42 12214.42,9996.09 12235,10016.67 J12.10
"motor L-": J12.9 R11.1 | length 278.1
  Top w6: R11.1 11954,9938 12046,10030 J12.9
"motor R+": J12.8 R3.1 | length 378
  Top w6: R3.1 12048.18,10117.82 12088,10078 12183,10078 J12.8
"motor R-": J12.7 R4.1 | length 267.8
  Top w6: R4.1 12067.93,10197.07 J12.7
NetC1_2: C1.2 D1.2 U1.1 U1.3 | length 204.9
  Top w6: C1.2 10472.69,9008.68 10525.17,9008.68 U1.3 10570.35,9010 10590.61,9010 10592.37,9011.76 10594.13,9013.51 10594.13,9016.26 10594.1,9016.52 10588.78,9078.15
NetC3_1: C3.1 U2.2 | length 208.1
  Top w6: C3.1 10198.58,9201 ccw(c10198.58,9301) 10269.29,9230.29 10308,9269 ccw(c10305.59,9271.41) 10309,9271.41 U2.2
NetC3_2: C3.2 U2.4 | length 142.9
  Top w6: C3.2 ccw(c10333.45,9253.01) 10407,9253.01 10407,9275 ccw(c10402.17,9279.83) 10409,9279.83 U2.4
NetC8_1: C8.1 C9.1 D2.2 LM1.1
NetC12_1: C12.1 D3.2 U4.1 U4.2
NetD4_1: D4.1 R12.1 | length 60.5
  Top w15: R12.1@11752.24,10959.88 D4.1@11752.24,11020.38
NetD5_1: D5.1 R13.1 | length 60.5
  Top w15: R13.1@11946.99,10959.88 D5.1@11946.99,11020.38
NetD6_2: D6.1 R14.1 | length 60.5
  Top w15: R14.1@12141.74,10959.88 D6.1@12141.74,11020.38
NetD7_1: D7.1 R15.1 | length 93.2
  Top w6: D7.1 D7.1@10123.74,11020.38 ; R15.1@10123.74,10959.88 R15.1
  Top w15: R15.1@10123.74,10959.88 D7.1@10123.74,11020.38
NetD8_1: D8.1 R16.1 | length 60.5
  Top w15: R16.1@10318.49,10959.88 D8.1@10318.49,11020.38
NetD9_1: D9.1 LS1.2 Q1.3 | length 352.1
  Top w6: D9.1 D9.1@12628,9335.68
  Top w30: D9.1@12628,9335.68 Q1.3 12724,9483 12752,9511 LS1.2
NetJ4_1: J4.1 L1.2
NetJ8_5: J8.5 J8.6 S3.1 | length 438.7
  Top w6: S3.1 S3.1@10975.22,11030.66 ; J8.6@11304.78,11030.66 J8.6
  Top w15: S3.1@10975.22,11030.66 J8.6@11304.78,11030.66 ; J8.6 J8.5
NetQ1_2: Q1.2 R31.2 | length 128.1
  Top w6: R31.2 12517.37,9567 12541,9567 12575,9533 Q1.2
NetR3_2: R3.2 U3.2 | length 126.7
  Top w6: U3.2 11724,10136 11799.57,10134.5 R3.2
NetR4_2: R4.2 U3.3 | length 123.2
  Top w6: U3.3 11799.57,10186 R4.2
NetR5_1: R5.1 R7.2 U4.5 | length 337.6
  Top w6: U4.5 9721.56,10796.38 9745.94,10796.38 9744.76,10916 9700.06,10916 R7.2 9683.37,10933.69 9683.37,10980.31 R5.1
NetR10_2: R10.2 U5.2 | length 126.7
  Top w6: U5.2@11696.44,9883.18 11724,9883.18 11799.57,9881.69 R10.2
NetR11_2: R11.2 U5.3 | length 123.2
  Top w6: U5.3@11696.44,9933.18 11799.57,9933.18 R11.2@11816.26,9944.26
NetR18_2: R18.2 U6.6 | length 138.4
  Top w6: R18.2@11395,9717.94 v1(11395,9751.18) ; R18.2 11418.87,9689 U6.6
NetR21_2: R21.2 U6.2 | length 126.7
  Top w6: U6.2@11692.44,9638.18 11720,9638.18 11795.57,9636.69 R21.2@11812.26,9620
NetR24_2: R24.2 U6.3 | length 123.2
  Top w6: U6.3@11692.44,9688.18 11795.57,9688.18 R24.2@11812.26,9699.26
PWM5: J11.16 R21.1 | length 1083.5
  Top w6: J11.16 11074,9730 11288,9516 11894.49,9516 11898,9519.51 11898,9607 R21.1
RPWM1: J8.2 R2.2 U3.7 | length 1177.9
  Top w6: v1(11390.38,10067.89) R2.2@11390.38,10101.13 ; R2.2 11407.87,10134.5 11474,10136 U3.7
  BOTTON w6: v1(11390.38,10067.89) 11411.96,10089.48 11444.49,10089.48 11448,10092.99 11448,10967.44 J8.2
RPWM2: J8.4 R1.2 U3.6 | length 950.7
  Top w6: v1(11392,10247) 11392,10213.76 R1.2 11407.87,10186 U3.6
  BOTTON w6: v1(11392,10247) 11392,10249.39 11408,10265.39 J8.4
RX: J9.3 J11.11 | length 2468.9
  Top w6: J11.11 10946.32,9980 11086,9980 11148,10042 11148,10631 11161,10644 12121,10644 12477,11000 J9.3
SERVODUTY: J15.3 R19.2 U6.7 | length 2875.4
  Top w6: v1(11400.12,9574.05) R19.2@11400.12,9607.29 ; R19.2 11421.61,9630.66 11474,9639 U6.7
  BOTTON w6: J15.3 9851,11122 9851,10879 9977,10753 10889,10753 11130,10512 11130,9876 11400.12,9605.88 v1(11400.12,9574.05)
TX: J9.2 J11.9 | length 2331.2
  Top w6: J11.9 10897,10030 10942,10075 11084,10075 11122,10113 11122,10656.49 11140.51,10675 12101,10675 12379,10953 12379,11098 J9.2
V5: C10.2 C13.1 C14.1 L1.1 LM1.3 R1.1 R2.1 R8.1 R9.1 R16.2 R18.1 R19.1 U3.8 U5.8 U6.8 | length 4655.8
  Top w20: v1(10319.75,10820) R16.2@10319.75,10880.62 ; v1(11201,10570) 11312.45,10458.55 R1.1 R2.1 11313,10117.27 11313,10068 11312.45,10067.45 R8.1 R9.1 11312.45,9787.34 11318.79,9781 ; 11321.79,10030 11492.77,10030 11501.56,10038.79 U3.8 ; R19.1@11322.19,9618.23 11324,9616.42 11324,9563 11344,9543 v1(11403,9543) 11492.77,9543 11501.56,9551.79 U6.8 ; R19.1 11324.82,9615.35 11324.82,9702.63 R18.1 11318.79,9708.66 11318.79,9781 ; U5.8 11501.56,9789.79 11492.77,9781 11318.79,9781
  BOTTON w15: v1(9694,9218) 9694.5,9218.5 v1(9727.5,9218.5)
  BOTTON w20: v1(9727.5,9218.5) 10903.5,9218.5 11228,9543 v1(11403,9543) 11414,9543 ; v1(10319.75,10820) 10951,10820 v1(11201,10570)
  other v1: 11372,9544
V6: C11.1 J15.2 R5.2 R6.2 R15.2 U4.4 | length 2187.3
  Top w15: 9983,10773 10003,10793 11337,10793 ; 10098,10793 v1(10125,10820) 10125,10880.62 R15.2
  Top w30: R5.2 9609.31,11001.69 9635.11,11060.73 9731.97,11077.86 J15.2 9875.69,11012.72 9946.47,11012.91 9951,10796 R6.2
VBAT: C7.1 D2.1 D3.1 S1.1
VBAT+: J2.1 S1.2
VCC: U2.5
VCC3.3: C2.2 J3.3 J5.5 J9.1 J12.1 R12.2 R17.1 R20.1 R22.1 R23.1 R25.1 R26.1 R27.1 R28.1 R29.1 R30.1 U1.5 | length 519.4
  Top w15: v1(11753.5,10820) R12.2@11753.5,10880.62 ; v1(12325,10421) R23.1 ; v1(12325,10521) R22.1 ; v1(12325,10621) R20.1 R20.1@12367.16,10620.21 ; v1(12325,10722) R17.1 ; v1(12641.84,10168) R25.1 ; v1(12643.84,9933.92) R30.1
  Top w30: R26.1 v1(11467,9099) ; R27.1 v1(11554,9099) ; R28.1 v1(11644,9099) ; R29.1 v1(11732,9099)
  other v1: 10689,9075 10688,9095 10658,9113 10687,9113
VCC5: C4.1 C15.2 C16.1 C17.2 D1.1 D9.2 J4.4 J7.1 J7.2 J7.3 J7.4 J14.7 J14.8 J16.4 LS1.1 R13.2 U2.8 U3.1 U3.4 U5.1 U5.4 U6.1 U6.4 | length 5782
  Top w15: v1(10907,9281) 10926,9262 11004,9262 v1(11021,9279) ; U6.1@11692.44,9588.18 v1(11758.88,9588.18) ; U6.4@11692.44,9738.18 11720,9738.18 v1(11756,9737.18) ; U5.1@11696.44,9833.18 v1(11762.88,9833.18) ; U5.4@11696.44,9983.18 11724,9983.18 v1(11760,9982.18) ; U3.1 v1(11762.88,10086) ; U3.4 11724,10236 v1(11760,10235) ; v1(11948.25,10820) R13.2@11948.25,10880.62
  Top w30: v1(12510,9091) 12511,9092 C17.2 12511.47,9167.79 12624.53,9167.79 D9.2 12742.87,9167.32 12786.55,9211 LS1.1
  BOTTON w15: 10782,9320 10821,9281 v1(10907,9281) ; v1(11245,8907) 11245,9041 11179,9107 11076,9107 11021,9162 v1(11021,9279) 11169,9279 11169,9357 11308,9496 11666.7,9496 v1(11758.88,9588.18) 11760,9589.3 v1(11760,9982.18) v1(11760,10235) 11760,10396 11948.25,10584.25 v1(11948.25,10820)
  BOTTON w30: J16.4 10996.32,8889.43 11013.89,8907 v1(11245,8907) 11755.43,8907 11773,8889.43 11773,8851 J14.8 ; J14.7 J14.8 ; v1(12510,9091) 12268,8849 J14.8
  other v1: 10095,9276 10064,9277 10110,9305 10082,9306
VCC-5: C5.2 C6.2 J7.9 J7.10 J7.11 J7.12 R14.2 | length 2263
  Top w15: J7.11 10752,9924 10822,9924 10846,9948 10846,10162 10860,10176 11049,10176 11078,10205 11078,10658 11118,10698 12090,10698 12142,10750 v1(12142,10824) 12142,10880.62 R14.2@12143,10880.62
pads on no net: H4.11 J10.7 J10.8 J10.9 J10.10 J11.8 J11.10 J11.13 J11.14 J11.15 J11.17 J11.18 J11.19 J11.20 J12.11 J12.12 J12.13 J12.14 J12.15 J12.16 R24.1 S1.3 S3.3 U1.4 U2.7

## Polygon pours and split planes (outlines as drawn)
GGND on BOTTON "GGND_L04_P032" (solid, remove dead copper, pour order 32): 9030,10424 10054,10415 10053,9572 9818,9192 9819,8656 9030,8656
GND on BOTTON "GND_L04_P031" (solid, remove dead copper, pour order 31): 9030,11216 12967,11216 12967,8655 12965,8657 9839,8657 9839,9185 9837,9187 10075,9568 10075,10434 9030,10434
VCC5 on BOTTON "VCC5_L04_P025" (solid, remove dead copper, pour order 25): 10021.51,9261.51 10073,9313 10073,9339 10506,9339 10595,9428 10595,9571 10778,9571 10798,9551 10794,9547 10794,9260.5
GGND on Top "GGND_L01_P033" (solid, remove dead copper, pour order 33): 9030,10424 10053,10414 10053,9568 9818,9194 9818,8655 9029,8657
GND on Top "GND_L01_P029" (solid, remove dead copper, pour order 29): 9030,11216 12967,11216 12967,8655 12965,8657 9839,8657 9839,9185 9837,9187 10075,9568 10075,10434 9030,10434
NetC8_1 on Top "NETC8_1_L01_P004" (solid, remove dead copper, pour order 4): 9675,9981 9675,9993.93 cw(c9692.07,9993.93) 9680,10006 9766,10006 ccw(c9710.47,10061.53) 9789,10061.53 9789,10076 9899.59,10076 ccw(c9899.59,10079.41) 9902,10077 ccw(c9902,10110.8) 9925.9,10086.9 9933,10094 10024,10094 10024,9914.41 ccw(c10027.41,9914.41) 10025,9912 cw(c9996.03,9940.97) 9996.03,9900 9618,9900 9618,9839.42 cw(c9518,9839.42) 9588.71,9768.71 9569,9749 9512.28,9749 cw(c9512.28,9817.28) 9464,9769 9464,9791.2 cw(c9511.8,9791.2) 9478,9825 9556.74,9903.74 cw(c9596,9864.48) 9596,9920 9920.2,9920 ccw(c9910.62,9937.83) 9930,9932 ccw(c9916.14,9929.26) 9924,9941 9680,9942
GGND on Top "GGND_L01_P028" (solid, remove dead copper, pour order 28): 9867,9786 9471,9732 9460,9721 9463.32,9717.68 9463.32,9619.38 9907.53,9533.47 9893,9631
GGND on Top "GGND_L01_P027" (solid, remove dead copper, pour order 27): 9804,10265 10034,10265 10034,10106 10035,10105 9797,10105
VCC5 on Top "VCC5_L01_P011" (solid, remove dead copper, pour order 11): 10122,8910 cw(c10122,8975.18) 10075.91,8929.09 10035,8970 cw(c10061.56,8996.56) 10024,8996.56 10024,9116.58 ccw(c9862.47,9172.63) 10016.31,9247.23 10093,9346 cw(c10175.08,9346) 10117.04,9404.04 10225.67,9512.67 ccw(c10169.34,9569) 10249,9569 10271.59,9569 ccw(c10271.59,9572.41) 10274,9570 cw(c10269.19,9565.18) 10276,9565.17 10276,9484 ccw(c10275.99,9418.83) 10229.91,9464.91 10154.29,9389.29 ccw(c10224.99,9318.58) 10125,9318.58 10125,9107.49 ccw(c10145.48,9107.48) 10131,9093 cw(c10135.83,9088.18) 10135.83,9095 10211,9095 10211,9029.42 cw(c10111.01,9029.42) 10181.71,8958.71 10133,8910
VCC-5 on Top "VCC-5_L01_P013" (solid, remove dead copper, pour order 13): 10427,9633 10379.14,9633 cw(c10379.14,9667.14) 10355,9643 10355,9843 10445.58,9843 ccw(c10445.58,9943) 10516.29,9872.29 10607,9963 cw(c10611.83,9958.17) 10611.83,9965 10782,9965 cw(c10760.27,9943.27) 10791,9943.27 10791,9793 10661.42,9793 cw(c10661.42,9893) 10590.71,9822.29 10575,9838 10537.42,9838 ccw(c10537.42,9738) 10466.71,9808.71 10458,9800 ccw(c10479.73,9778.27) 10449,9778.27 10449,9627 10397.46,9627 cw(c10397.46,9688.46) 10354,9645
GND on Top "GND_L01_P024" (solid, remove dead copper, pour order 24): 10554,9637 10553,9638 10463,9650 10470,9582 10468,9580 10553,9580
GND on Top "GND_L01_P023" (solid, remove dead copper, pour order 23): 10692,9036 10693,8946 10830,8945 10818,9038
VCC3.3 on Top "VCC3.3_L01_P022" (solid, remove dead copper, pour order 22): 10623.44,9125.48 10612,9081 10623,9057 10774,9063 10764.54,9124.51
NetC1_2 on Top "NETC1_2_L01_P021" (solid, remove dead copper, pour order 21): 10586,9197 10572,9108 10510,9096 10515,9064 10590,9064 10602,9141 10658,9134 10641,9199 10631,9202
VCC5 on Top "VCC5_L01_P020" (solid, remove dead copper, pour order 20): 10548,9141 10499,9146 10532,9570 10795,9571 10793,9376 10578,9231 10569,9142
GGND on Top "GGND_L01_P019" (solid, remove dead copper, pour order 19): 9144,10419 9305,10395 9292,10247 9092,10258 9083,10407
V6 on Top "V6_L01_P018" (solid, remove dead copper, pour order 18): 9604,10754 cw(c9606.41,10751.59) 9606.41,10755 9767,10755 9767,10756.23 cw(c9855.77,10756.23) 9793,10819 9932.58,10819 cw(c9932.58,10719) 10003.29,10789.71 10004,10789 10004,10762.8 cw(c9956.2,10762.8) 9990,10729 cw(c9982.76,10736.24) 9982.76,10726 9762,10726 9756.63,10720.63 cw(c9702,10775.25) 9702,10698 9633.31,10698 cw(c9633.31,10725.31) 9614,10706
GND on Top "GND_L01_P017" (solid, remove dead copper, pour order 17): 9599,10686 9865.47,10686 ccw(c9865.47,10764.53) 9921,10709 9967.44,10709 cw(c9967.44,10671.44) 9994,10698 9994,10559.8 cw(c9946.2,10559.8) 9980,10526 9805.56,10526 cw(c9805.56,10563.56) 9779,10537 ccw(c9769.34,10546.66) 9783,10546.66 9783,10628 9613.49,10628 cw(c9613.49,10648.49) 9599,10634
NetC12_1 on Top "NETC12_1_L01_P016" (solid, remove dead copper, pour order 16): 9712,10209 9855.71,10352.71 ccw(c9785,10423.42) 9885,10423.42 9885,10500 9799.14,10500 ccw(c9799.14,10465.86) 9775,10490 cw(c9842.6,10557.6) 9747,10557.6 9747,10619 9589.41,10619 cw(c9589.41,10622.41) 9587,10620 9587,10553.42 ccw(c9687,10553.42) 9616.29,10482.71 9683.71,10415.29 ccw(c9754.42,10486) 9754.42,10386 9779,10386 9779,10374.42 cw(c9679,10374.42) 9749.71,10303.71 9690,10244 ccw(c9692.41,10241.59) 9689,10241.59 9689,10216
GND on Top "GND_L01_P015" (solid, remove dead copper, pour order 15): 10245,9101 cw(c10257.07,9088.93) 10257.07,9106 10393,9106 10393,9013.04 cw(c10334.96,9013.04) 10376,8972 10278.14,8972 cw(c10278.14,9006.14) 10254,8982
GND on Top "GND_L01_P014" (solid, remove dead copper, pour order 14): 10325,9838 cw(c10326.76,9842.26) 10322.5,9840.5 10169,9838 10169,9772 10303.27,9772 ccw(c10303.27,9802.73) 10325,9781
GND on Top "GND_L01_P012" (solid, remove dead copper, pour order 12): 9976,8932 cw(c9916.24,8995.84) 9905.96,8909 9886,8909 cw(c9919.8,8942.8) 9872,8942.8 9872,8995 ccw(c9872,9048.11) 9909.56,9010.56 9934,9035 9934,9259.58 cw(c10034,9259.58) 9963.29,9330.29 10104,9471 ccw(c10062.96,9512.04) 10121,9512.04 10121,9569 10107.29,9582.71 cw(c10178,9653.42) 10078,9653.42 10078,9738 10155.06,9738 cw(c10155.06,9656.06) 10213,9714 10213,9580.42 cw(c10113.01,9580.42) 10183.71,9509.71 10180,9506 ccw(c10180,9467.38) 10152.69,9494.69 10133,9475 cw(c10048.51,9475) 10108.25,9415.25 9984,9259.58
NetJ4_1 on Top "NETJ4_1_L01_P009" (solid, remove dead copper, pour order 9): 9567,9054 cw(c9506.64,8993.64) 9592,8993.64 9592,8908 9599.3,8908 ccw(c9599.3,8979.7) 9650,8929 cw(c9674.14,8953.14) 9640,8953.14 9640,9033
GGND on Top "GGND_L01_P008" (solid, remove dead copper, pour order 8): 9235,9281 9310.58,9281 ccw(c9310.58,9381) 9381.29,9310.29 9504,9433 9522.57,9414.43 ccw(c9555,9446.87) 9555,9401 9555,9360.42 ccw(c9655,9360.42) 9584.29,9289.71 9596,9278 9596,9230.24 cw(c9585.76,9230.24) 9593,9223 cw(c9590.59,9225.41) 9590.59,9222 9500,9222 9500,9004.42 ccw(c9600,9004.42) 9529.29,8933.71 9587,8876 ccw(c9587,8965.33) 9650.16,8902.16 9725,8977 ccw(c9705.69,8996.31) 9733,8996.31 9733,9107 9769.44,9107 cw(c9769.44,9069.44) 9796,9096 9796,8786.9 cw(c9772.1,8786.9) 9789,8770 ccw(c9752.79,8733.79) 9752.79,8785 9445,8785
V5 on Top "V5_L01_P007" (solid, remove dead copper, pour order 7): 9470,9600 9561,9600 9563.71,9597.29 cw(c9493,9526.58) 9593,9526.58 9593,9465 ccw(c9624.38,9496.38) 9624.38,9452 9720,9452 9720,9255.14 ccw(c9754.14,9255.14) 9730,9231 cw(c9730,9141.67) 9793.16,9204.84 9815,9183 cw(c9786.03,9183) 9806.51,9162.51 9781,9137 9622,9137 9622,9343.58 ccw(c9522,9343.58) 9592.71,9414.29 9484.97,9522.03 cw(c9525.94,9563) 9468,9563
VBAT on Top "VBAT_L01_P001" (solid, pour order 1): 9460,10074 9460,10345.3 cw(c9531.7,10345.3) 9481,10396 9548.62,10396 cw(c9548.62,10351.62) 9580,10383 cw(c9575.17,10378.17) 9582,10378.17 9582,10192 9711.96,10192 cw(c9711.96,10133.96) 9753,10175 ccw(c9762.66,10165.34) 9749,10165.34 9749,10016 9559.42,10016 cw(c9559.42,10116) 9488.71,10045.29 9459,10075
VBAT+ on Top "VBAT+_L01_P000" (solid, pour order 0): 9261.67,9769 ccw(c9202.92,9827.75) 9286,9827.75 9286,10127 cw(c9339.11,10073.89) 9339.11,10149 9423,10149 cw(c9381.96,10107.96) 9440,10107.96 9440,9790.97 cw(c9399.03,9790.97) 9428,9762 ccw(c9411.1,9745.1) 9411.1,9769
VCC3.3 on PWR03 (split plane): 12946.91,8675.1 9840.99,8675.85 9837.53,9186.31 10073.48,9564.03 10073.55,9564.18 10073.65,9564.32 10074.09,9565.38 10074.57,9566.43 10074.59,9566.59 10074.66,9566.75 10074.81,9567.89 10075,9569.02 10074.98,9569.19 10075.01,9569.36 10076.08,10416.83 10076.13,10416.87 10077.74,10418.96 10078.74,10421.39 10079.09,10424 10078.74,10426.61 10077.74,10429.04 10076.13,10431.13 10074.04,10432.74 10071.61,10433.74 10069,10434.09 9050.1,10434.09 9050.1,11194.9 12946.91,11194.9
GGND on PWR03 (split plane): 10054.84,9572.27 9818.87,9194.52 9818.78,9194.32 9818.65,9194.16 9818.23,9193.13 9817.77,9192.12 9817.74,9191.91 9817.66,9191.72 9817.52,9190.62 9817.34,9189.52 9817.36,9189.31 9817.33,9189.1 9820.82,8675.85 9050.1,8676.04 9050.1,10413.91 10055.9,10413.91
GND on GND02 (split plane): 12946.91,8675.1 9840.99,8675.85 9837.53,9186.31 10073.48,9564.03 10073.55,9564.18 10073.65,9564.32 10074.09,9565.38 10074.57,9566.43 10074.59,9566.59 10074.66,9566.75 10074.81,9567.89 10075,9569.02 10074.98,9569.19 10075.01,9569.36 10076.08,10416.83 10076.13,10416.87 10077.74,10418.96 10078.74,10421.39 10079.09,10424 10078.74,10426.61 10077.74,10429.04 10076.13,10431.13 10074.04,10432.74 10071.61,10433.74 10069,10434.09 9050.1,10434.09 9050.1,11194.9 12946.91,11194.9
GGND on GND02 (split plane): 10054.84,9572.27 9818.87,9194.52 9818.78,9194.32 9818.65,9194.16 9818.23,9193.13 9817.77,9192.12 9817.74,9191.91 9817.66,9191.72 9817.52,9190.62 9817.34,9189.52 9817.36,9189.31 9817.33,9189.1 9820.82,8675.85 9050.1,8676.04 9050.1,10413.91 10055.9,10413.91

## Other copper
Top:
  pour cut-out: 11783.06,9720.76 11921.69,9720.76 11921.69,9582.13 11783.06,9582.13 11783.06,9635
  pour cut-out: 11787.06,9967.76 11925.69,9967.76 11925.69,9829.13 11787.06,9829.13 11787.06,9882
  pour cut-out: 11786.06,10226.76 11924.69,10226.76 11924.69,10088.13 11786.06,10088.13 11786.06,10141
  pour cut-out: 10282,10936 10356,10936 10356,10900 10282,10900 10282,10903
  pour cut-out: 10082,10938 10156,10938 10156,10902 10082,10902 10082,10905
  pour cut-out: 10280,11100 10354,11100 10354,11064 10280,11064 10280,11067
  pour cut-out: 10087,11098 10161,11098 10161,11062 10087,11062 10087,11065
  pour cut-out: 12105,10940 12179,10940 12179,10904 12105,10904 12105,10907
  pour cut-out: 11911,10939 11985,10939 11985,10903 11911,10903 11911,10906
  pour cut-out: 11713,10936 11787,10936 11787,10900 11713,10900 11713,10903
  pour cut-out: 11640,10262 11777,10262 11777,10062 11641.34,10062 11641.34,10080.99
  pour cut-out: 11641,9763 11778,9763 11778,9563 11642.34,9563 11642.34,9581.99
  pour cut-out: 11546,10266 11546,10083 11314,10083 11314,10220.28 11457,10220.28 11457,10266
  pour cut-out: 11647,10010 11784,10010 11784,9810 11648.34,9810 11648.34,9828.99
  pour cut-out: 10865,10458 10955,10458 10955,10456 10996.32,10430 10996.32,10225 10791,10225
  pour cut-out: 9812.07,9153.65 9798.96,9140.54 9801.26,9124 9818.08,9124 9818.08,9151.31
  pour cut-out: 9690,9135 9818,9135 9818,9124 9690,9124
  pour cut-out: 9533.5,9135 9690,9135 9690,9081 9533.5,9081
  pour cut-out: 9573,9446 9585,9446 9585,9390 9573,9390
  pour cut-out: 9453,9614 9577.88,9614 9577.88,9600.55 9459.82,9600.55
GND02 (plane layer: these items are gaps in the copper):
  lines w20: 9025,10424 10069,10424 ccw(c10069,10421) 10066,10421 10064.92,9569.37 9827.42,9189.17 9831,8662
PWR03 (plane layer: these items are gaps in the copper):
  lines w20: 9025,10424 10069,10424 ; 9831,8662 9827.42,9189.17 10064.92,9569.37 10066,10421

## Silkscreen, mask and mechanical layers (free items; w line width, h text height)
Top Overlay:
  circle w10: c10217,9371 r8.6
  text "+" at 9039,9839 h30
  text "-" at 9037,9313 h30
Mechanical 1:
  lines w10: 9029,8654 12966.01,8654 12966.01,11214 9029,11214 9029,8654.94 ; 9030,8655 12967.01,8655 12967.01,11215 9030,11215 9030,8655.94

## Dimensions
9028,8654.94 to 9028,11214 on Mechanical 1
9028,8654 to 12968,8594 on Mechanical 1
9029,8655 to 12969,8595 on Mechanical 1
9029,8655.94 to 9029,11215 on Mechanical 1

## Text inside footprints (layer, text, board x,y; h text height)
J6: Top Overlay "2" at 10722,10684 h50 r270; Top Overlay "1" at 10622,10684 h50 r270; Top Overlay "1" at 10568,10054 h30 r90; Top Overlay "1" at 10567,10095 h30 r90; Top Overlay "12" at 10805,10103 h30 r270
J7: Top Overlay "12" at 10571,9908 h30 r90; Top Overlay "1" at 10806,9924 h30 r270; Top Overlay "1" at 10806,9964 h30 r270; Top Overlay "1" at 10766,9330 h50 r90; Top Overlay "2" at 10666,9330 h50 r90
J8: Top Overlay "1" at 11588,11147.44 h50 r180; Top Overlay "2" at 11608,11047.44 h50 r180; Top Overlay "5" at 11248,11147.44 h50 r180; Top Overlay "6" at 11248,11047.44 h50 r180
J10: Top Overlay "2" at 12082,9200 h50; Top Overlay "1" at 12083,9308 h50
J11: Top Overlay "1" at 10876.32,10530 h50 r270; Top Overlay "2" at 10976.32,10530 h50 r270; Top Overlay "21" at 10876.32,9370 h50 r270; Top Overlay "22" at 10976.32,9370 h50 r270
J12: Top Overlay "22" at 12215,9370 h50 r270; Top Overlay "21" at 12115,9370 h50 r270; Top Overlay "2" at 12215,10530 h50 r270; Top Overlay "1" at 12115,10530 h50 r270
J14: Top Overlay "8" at 11831,8829 h50; Top Overlay "7" at 11831,8729 h50; Top Overlay "1" at 11391,8729 h50; Top Overlay "2" at 11371,8829 h50
LS1: Top Overlay "+" at 12826.96,9261 h30 r90